# Altium PCB no_name.PcbDoc
Units mm, origin at the board's own origin, x right, y up, seen from the top; angles counter-clockwise.
Board outline 54.74 x 62.86 mm, 2 copper layers (Top Layer, Bottom Layer); 51 components, 55 nets, 267 pads, 40 vias.
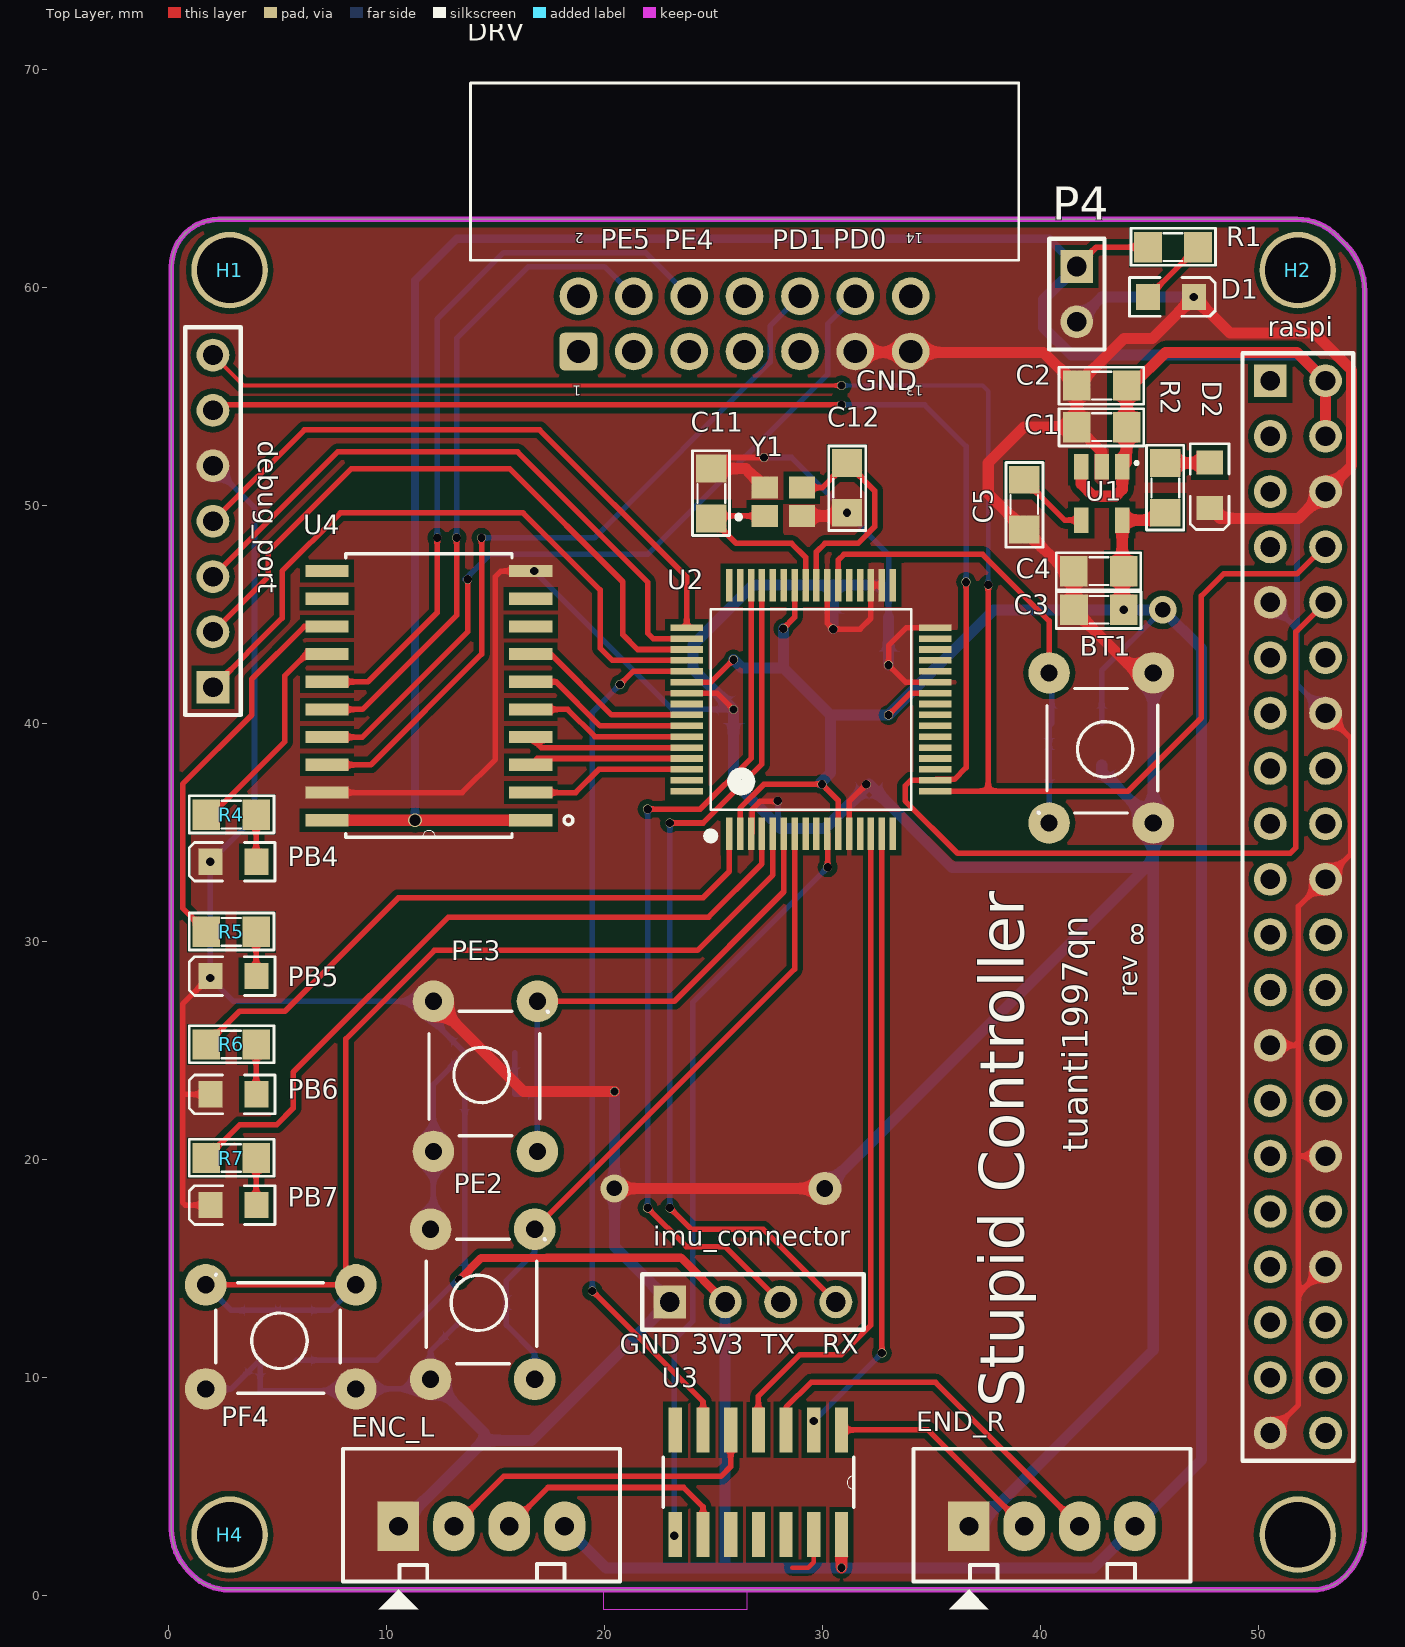
[diagram p0: Top Layer view]
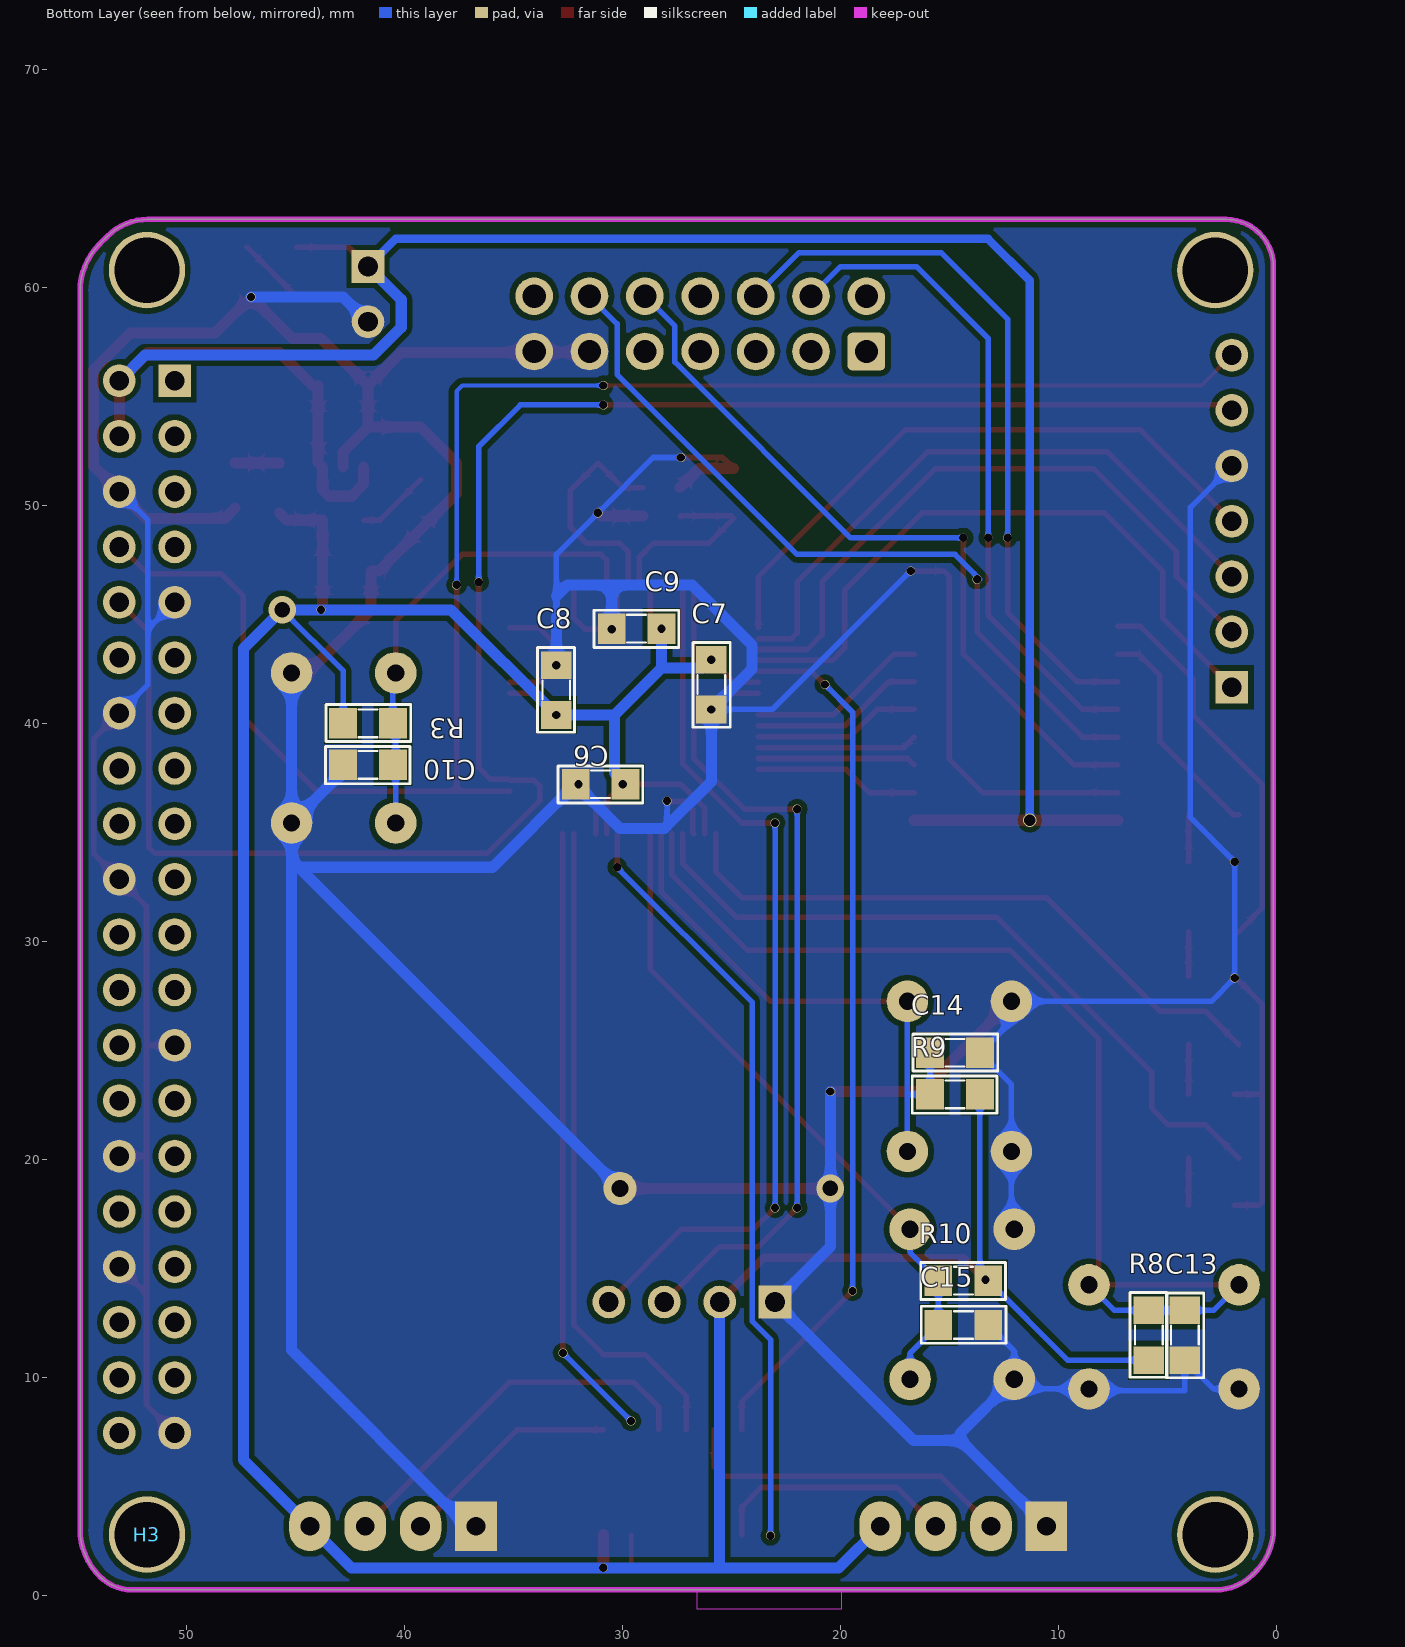
[diagram p1: Bottom Layer view, seen from below]
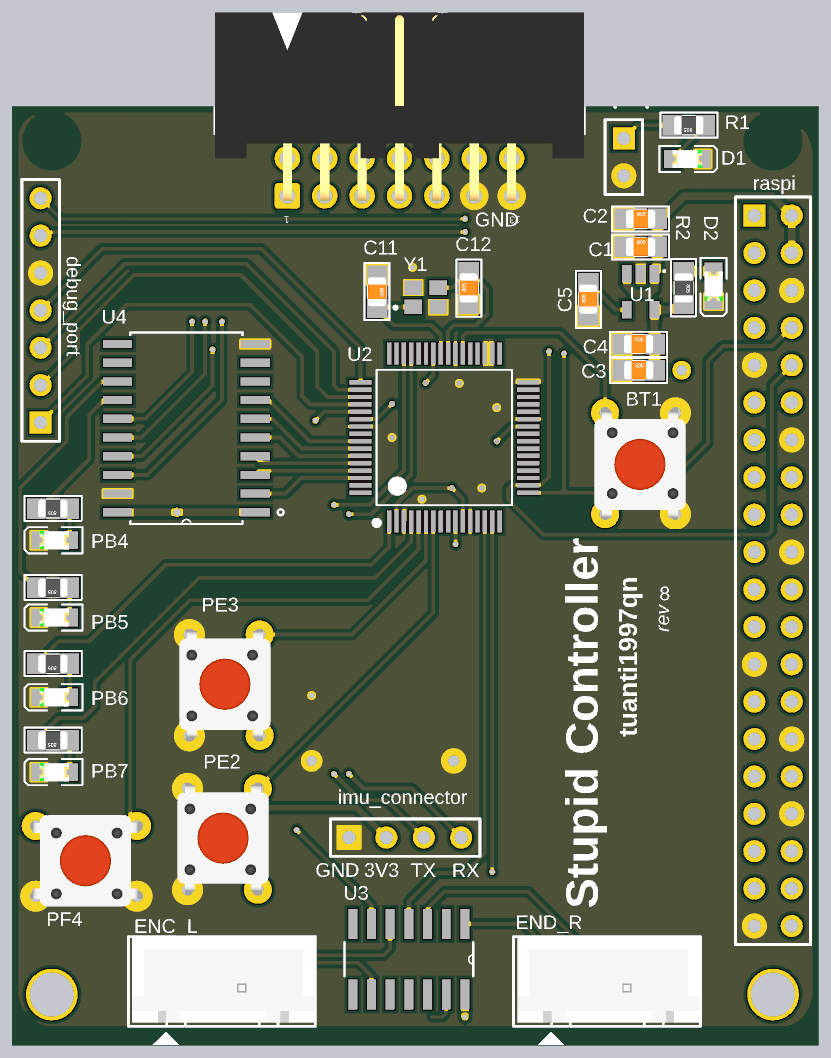
[diagram p2: 3D render of the assembled board from above, using the file's embedded part models]
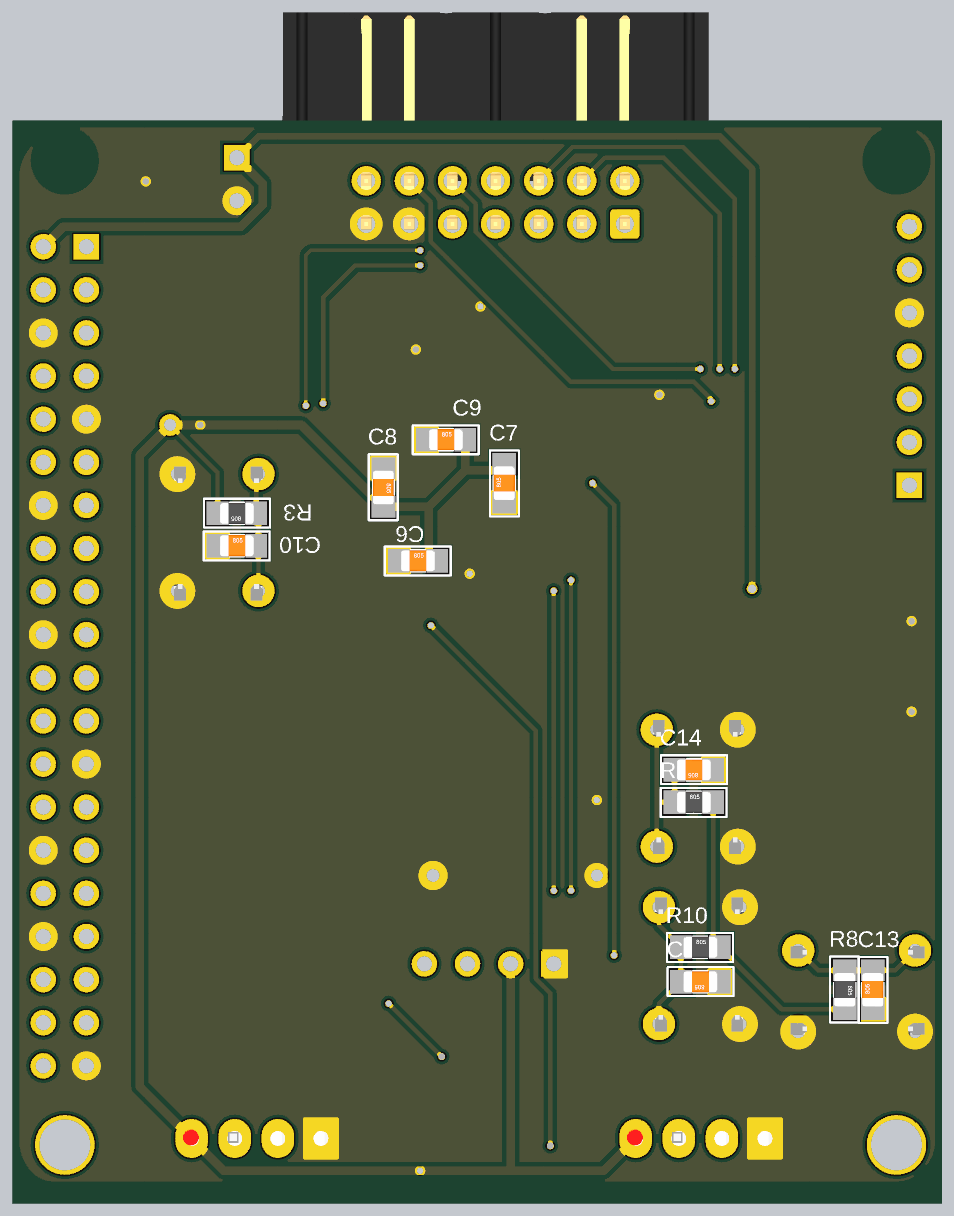
[diagram p3: 3D render of the assembled board from below, using the file's embedded part models]

## Layer stack, top to bottom
Top Solder: solder mask 0.0102, Solder Resist, Dk 3.5
Top Layer: signal copper 0.0356
Dielectric 1: dielectric 0.32, FR-4, Dk 4.8
Bottom Layer: signal copper 0.0356
Bottom Solder: solder mask 0.0102, Solder Resist, Dk 3.5

## Board outline
0.935,1.097 1.069,0.963 ccw(c2.781,2.676) 2.781,0.254 52.455,0.254 ccw(c52.455,2.391) 53.966,0.88 ccw(c51.798,3.048) 54.864,3.048 54.864,59.817 ccw(c51.798,59.817) 53.966,61.985 53.594,62.357 ccw(c51.754,60.517) 51.754,63.119 2.295,63.119 ccw(c2.295,60.951) 0.762,62.484 ccw(c2.295,60.951) 0.127,60.951 0.127,58.42 0.127,3.048 ccw(c2.886,3.048)
cut-out: 19.939,0.254 19.939,-0.635 26.543,-0.635 26.543,0.254

## Design rules (kind name [scope] priority, off if disabled: settings)
Clearance [All] p1: gap=0.254 ignorepadtopadclearanceinfootprint=FALSE except(0: Arc-Hole Track-Hole SMDPad-Hole THPad-Hole Via-Hole Fill-Hole Poly-Hole Region-Hole Text-Hole; 0.178: Arc-Arc Arc-Track Arc-SMDPad Arc-THPad Arc-Via Arc-Text Track-Track Track-SMDPad Track-THPad Track-Via Track-Text SMDPad-SMDPad SMDPad-THPad SMDPad-Via SMDPad-Text THPad-THPad THPad-Via THPad-Text Via-Via Via-Text Text-Text)
PlaneConnect [All] p1: planeconnectstyle=Direct reliefexpansion=0.508 reliefentries=4 reliefconductorwidth=0.254 reliefairgap=0.254
PolygonConnect [All] p1: connectstyle=Direct reliefconductorwidth=0.254 reliefentries=4 polygonreliefangle="90 Angle" airgapwidth=0.254
RoutingVias [All] p1: holewidth=0.711 width=1.27 viastyle="Through Hole" minholewidth=0.254 minwidth=0.305 maxholewidth=0.381 maxwidth=0.406
SolderMaskExpansion [All] p1: expansion=0.102
Width [All] p1: maxlimit=0.635 minlimit=0.203 preferedwidth=0.381
29 further rules are at their usual default settings.

## Components (designator, comment, footprint, x,y, rotation, side; value= is the part's Value field where it differs from the comment)
BT1 "BT" SW4 45.364,41.986 r270 top
C1 "Cap Non-Pol SMD" CAP-SM-0805 41.656,53.594 r0 top value=1uF
C2 "Cap Non-Pol SMD" CAP-SM-0805 41.656,55.499 r0 top value=104
C3 "Cap Non-Pol SMD" CAP-SM-0805 41.529,45.212 r0 top value=1uF
C4 "Cap Non-Pol SMD" CAP-SM-0805 41.52,46.99 r0 top value=104
C5 "Cap Non-Pol SMD" CAP-SM-0805 39.243,48.895 r90 top value=22nF
C6 "Cap Non-Pol SMD" CAP-SM-0805 32.131,37.211 r180 bottom value=104
C7 "Cap Non-Pol SMD" CAP-SM-0805 25.908,40.64 r90 bottom value=104
C8 "Cap Non-Pol SMD" CAP-SM-0805 33.02,42.672 r270 bottom value=104
C9 "Cap Non-Pol SMD" CAP-SM-0805 30.48,44.348 r180 bottom value=104
C10 "Cap Non-Pol SMD" CAP-SM-0805 42.799,38.1 r180 bottom value=100nF
C11 "Cap Non-Pol SMD" CAP-SM-0805 24.892,51.689 r270 top value=10pF
C12 "Cap Non-Pol SMD" CAP-SM-0805 31.115,49.657 r90 top value=10pF
C13 "Cap Non-Pol SMD" CAP-SM-0805 4.191,10.795 r90 bottom value=100nF
C14 "Cap Non-Pol SMD" CAP-SM-0805 13.589,24.892 r0 bottom value=100nF
C15 "Cap Non-Pol SMD" CAP-SM-0805 13.208,12.407 r0 bottom value=100nF
D1 "LED SMD" LED_0805_Blue 45.974,59.563 r0 top
D2 "LED SMD" LED_0805_Blue 47.752,50.927 r270 top
debug_port "DEBUG PORT" HDR1X7 2.032,41.656 r90 top (schematic designator P1)
DRV "shrouded box header" 14P_PCB_HEADER_BRD_MNT_RA 26.416,58.327 r90 top value="Double-row, 14 positions"
ENC_L "ENC_L" CON4 10.541,3.175 r0 top value="Connector 4"
END_R "END_R" CON4 36.703,3.175 r0 top value="Connector 4"
H1 "Hole" "LO KHOAN 3MM"#1 120.269,55.499 r0 top
H2 "Hole" "LO KHOAN 3MM"#2 115.316,55.499 r0 top
H3 "Hole" "LO KHOAN 3MM"#3 6.814,55.841 r180 bottom
H4 "Hole" "LO KHOAN 3MM"#4 2.794,2.794 r0 top
imu_connector "Header 4" HDR1X4 22.987,13.462 r0 top (schematic designator P3)
P4 "Header 2" HDR1X2 41.656,60.96 r270 top
PB4 "LED SMD" LED_0805_Blue 2.972,33.655 r180 top
PB5 "LED SMD" LED_0805_Blue 2.972,28.409 r180 top
PB6 "LED SMD" LED_0805_Blue 2.972,22.987 r180 top
PB7 "LED SMD" LED_0805_Blue 2.972,17.907 r180 top
PE2 "BT" SW4 11.811,10.248 r90 top
PE3 "BT" SW4 11.938,20.701 r90 top
PF4 "BT" SW4 8.255,9.271 r180 top
R1 "RESISTOR SMD" RES-SM-0805 47.21,61.849 r180 top value=1K
R2 "RESISTOR SMD" RES-SM-0805 45.72,51.946 r270 top value=1K
R3 "RESISTOR SMD" RES-SM-0805 40.513,40.005 r0 bottom value=1K
R4 "RESISTOR SMD" RES-SM-0805 4.013,35.814 r180 top value=1K
R5 "RESISTOR SMD" RES-SM-0805 4.013,30.441 r180 top value=1K
R6 "RESISTOR SMD" RES-SM-0805 4.013,25.273 r180 top value=1K
R7 "RESISTOR SMD" RES-SM-0805 4.013,20.066 r180 top value=1K
R8 "RESISTOR SMD" RES-SM-0805 5.842,13.081 r270 bottom value=1K
R9 "RESISTOR SMD" RES-SM-0805 15.875,22.987 r180 bottom value=1K
R10 "RESISTOR SMD" RES-SM-0805 15.494,14.439 r180 bottom value=1K
raspi "Header 20X2" HDR2X20 50.524,55.714 r270 top locked (schematic designator P2)
U1 "RT9193-33GB" *SOT94P279X129-5N 42.799,50.546 r270 top
U2 "TM4C123GH6PMI" *QFP50P1200X1200X160-64N 29.464,40.64 r90 top
U3 "SN74HC14DR" *SOIC127P600X175-14N 23.241,2.794 r270 top
U4 "SN74HC245DWR" *SOIC127P1030X265-20N 11.938,41.275 r180 top
Y1 "ECS-480-8-36-CKM" *XTAL_ECS-480-8-36-CKM 28.194,50.165 r0 top

## Footprints (in the part's own frame and the unit in brackets; to place one, negate y for a bottom-side part, rotate by r counter-clockwise, add the part's x,y. Pads: shape width x height; smd on the part's side, far side on the other; paste and mask are expansions set on the pad)
14P_PCB_HEADER_BRD_MNT_RA [mil] "HEADER BRD MNT R/A 14POS 2.54MM"
  round 40 on Mech15: 0(0,0) 0(460,0)
  rrect25% 68x68 hole 42: 1(-50,300)
  round 68 hole 42: 2(50,300) 3(-50,200) 4(50,200) 5(-50,100) 6(50,100) 7(-50,0) 8(50,0) 9(-50,-100) 10(50,-100) 11(-50,-200) 12(50,-200) 13(-50,-300) 14(50,-300)
  silkscreen extent 115,-495 435,495, body extent -62,-494 440,494, height 340
*QFP50P1200X1200X160-64N [mm]
  rect 1.5x0.3 smd: 1(-5.7,3.75) 2(-5.7,3.25) 3(-5.7,2.75) 4(-5.7,2.25) 5(-5.7,1.75) 6(-5.7,1.25) 7(-5.7,0.75) 8(-5.7,0.25) 9(-5.7,-0.25) 10(-5.7,-0.75) 11(-5.7,-1.25) 12(-5.7,-1.75) 13(-5.7,-2.25) 14(-5.7,-2.75) 15(-5.7,-3.25) 16(-5.7,-3.75) 33(5.7,-3.75) 34(5.7,-3.25) 35(5.7,-2.75) 36(5.7,-2.25) 37(5.7,-1.75) 38(5.7,-1.25) 39(5.7,-0.75) 40(5.7,-0.25) 41(5.7,0.25) 42(5.7,0.75) 43(5.7,1.25) 44(5.7,1.75) 45(5.7,2.25) 46(5.7,2.75) 47(5.7,3.25) 48(5.7,3.75)
  rect 0.3x1.5 smd: 17(-3.75,-5.7) 18(-3.25,-5.7) 19(-2.75,-5.7) 20(-2.25,-5.7) 21(-1.75,-5.7) 22(-1.25,-5.7) 23(-0.75,-5.7) 24(-0.25,-5.7) 25(0.25,-5.7) 26(0.75,-5.7) 27(1.25,-5.7) 28(1.75,-5.7) 29(2.25,-5.7) 30(2.75,-5.7) 31(3.25,-5.7) 32(3.75,-5.7) 49(3.75,5.7) 50(3.25,5.7) 51(2.75,5.7) 52(2.25,5.7) 53(1.75,5.7) 54(1.25,5.7) 55(0.75,5.7) 56(0.25,5.7) 57(-0.25,5.7) 58(-0.75,5.7) 59(-1.25,5.7) 60(-1.75,5.7) 61(-2.25,5.7) 62(-2.75,5.7) 63(-3.25,5.7) 64(-3.75,5.7)
  silkscreen extent -6.08,-4.6 4.6,4.88
*SOIC127P600X175-14N [mil]
  rect 81x24 smd: 1(-189,300) 2(-189,250) 3(-189,200) 4(-189,150) 5(-189,100) 6(-189,50) 7(-189,0) 8(0,0) 9(0,50) 10(0,100) 11(0,150) 12(0,200) 13(0,250) 14(0,300)
  silkscreen extent -140,-22 -49,322
*SOIC127P1030X265-20N [mil]
  rect 78x22 smd: 1(-184,225) 2(-184,175) 3(-184,125) 4(-184,75) 5(-184,25) 6(-184,-25) 7(-184,-75) 8(-184,-125) 9(-184,-175) 10(-184,-225) 11(184,-225) 12(184,-175) 13(184,-125) 14(184,-75) 15(184,-25) 16(184,25) 17(184,75) 18(184,125) 19(184,175) 20(184,225)
  silkscreen extent -260,-256 150,256
*SOT94P279X129-5N [mm]
  rect 1.17x0.67 smd: 1(-1.22,0.94) 2(-1.22,0) 3(-1.22,-0.94) 4(1.22,-0.94) 5(1.22,0.94)
  silkscreen extent -1.47,1.53 -1.33,1.67
*XTAL_ECS-480-8-36-CKM [mm]
  rect 1.2x1 smd: 1(-0.85,-0.65) 2(0.85,-0.65) 3(0.85,0.65) 4(-0.85,0.65)
  silkscreen extent -2.15,-0.8 -1.95,-0.6
CAP-SM-0805 [mil]
  rect 50x55 smd: 1(0,0) 2(90,0)
  silkscreen extent -32,-34 121,33, body extent 6,-25 84,25, height 31
CON4 [mil]
  rect 75x90 hole 34: 1(0,0)
  oval 75x90 hole 34: 2(100,0) 3(200,0) 4(300,0)
  silkscreen extent -100,-150 400,140, body extent -90,-90 398,136, height 276
HDR1X2 [mm] "Connector; Header; 2 Position"
  rect 1.5x1.5 hole 0.9: 1(0,0)
  round 1.5 hole 0.9: 2(2.54,0)
  silkscreen extent -1.27,-1.27 3.81,1.27
HDR1X4 [mm] "Connector; Header; 4 Position"
  rect 1.5x1.5 hole 0.9: 1(0,0)
  round 1.5 hole 0.9: 2(2.54,0) 3(5.08,0) 4(7.62,0)
  silkscreen extent -1.27,-1.27 8.89,1.27
HDR1X7 [mm] "Connector; Header; 7 Position"
  rect 1.5x1.5 hole 0.9: 1(0,0)
  round 1.5 hole 0.9: 2(2.54,0) 3(5.08,0) 4(7.62,0) 5(10.16,0) 6(12.7,0) 7(15.24,0)
  silkscreen extent -1.27,-1.27 16.51,1.27
HDR2X20 [mm] "Connector; Header; 20x2 Position"
  rect 1.5x1.5 hole 0.9: 1(0,0)
  round 1.5 hole 0.9: 2(0,2.54) 3(2.54,0) 4(2.54,2.54) 5(5.08,0) 6(5.08,2.54) 7(7.62,0) 8(7.62,2.54) 9(10.16,0) 10(10.16,2.54) 11(12.7,0) 12(12.7,2.54) 13(15.24,0) 14(15.24,2.54) 15(17.78,0) 16(17.78,2.54) 17(20.32,0) 18(20.32,2.54) 19(22.86,0) 20(22.86,2.54) 21(25.4,0) 22(25.4,2.54) 23(27.94,0) 24(27.94,2.54) 25(30.48,0) 26(30.48,2.54) 27(33.02,0) 28(33.02,2.54) 29(35.56,0) 30(35.56,2.54) 31(38.1,0) 32(38.1,2.54) 33(40.64,0) 34(40.64,2.54) 35(43.18,0) 36(43.18,2.54) 37(45.72,0) 38(45.72,2.54) 39(48.26,0) 40(48.26,2.54)
  silkscreen extent -1.27,-1.27 49.53,3.81
LED_0805_Blue [mm] "Chip LED, 2-Leads, Body 2.0x1.3mm, IPC Medium Density"
  rect 1.1x1.2 smd: 1(-1.05,0) 2(1.05,0)
  silkscreen extent -1.91,-0.89 2.03,0.89, body extent -1,-0.63 1,0.62, height 0.68
"LO KHOAN 3MM"#1 [mil]
  round 138 hole 118.1: 1(-4625,208.46)
"LO KHOAN 3MM"#2 [mil]
  round 138 hole 118.1: 1(-2500.87,208.46)
"LO KHOAN 3MM"#3 [mil]
  round 138 hole 118.1: 1(-1770.87,-2088.46)
"LO KHOAN 3MM"#4 [mil]
  round 138 hole 118.1: 1(0,0)
RES-SM-0805 [mil]
  rect 50x55 smd: 1(0,0) 2(90,0)
  silkscreen extent -32,-34 121,33, body extent 6,-25 84,25, height 31
SW4 [mil] "SW button 4pin, 250 x250 mil"
  round 75 hole 31: 1(-13,-8) 1(258,-8) 2(-13,-196) 2(258,-196)
  silkscreen extent 15,-215 240,0, body extent -31,-225 281,19, height 276

## Part data
BT1 PE2 PE3 PF4: library part BUTTON
C1 C2 C3 C4 C5 C6 C7 C8 C9 C10 C11 C12 C13 C14 C15: "Capacitor"
D1 D2 PB4 PB5 PB6 PB7: "LED"
debug_port: library part "Header 7", "Header, 7-Pin", LatestRevisionDate=17-Jul-2002, LatestRevisionNote="Re-released for DXP Platform.", Publisher="Altium Limited"
DRV: library part CONN_HEADER_2x7P_RA_0.100in_Male, "Header THD 14 POS Double-row right-angle 2.54mm pitch", Manufacturer 1=3M, Manufacturer Part Number 1=D2514-5002-AR, Package / Case="Connector header; 2.54mm pitch", Supplier Part Number 1=MHE14E-ND, ComponentLink1Description=http://multimedia.3m.com/mws/mediawebserver?66666UuZjcFSLXTtm8T_oxMcEVuQEcuZgVs6EVs6E666666--, ComponentLink1URL=http://multimedia.3m.com/mws/mediawebserver?66666UuZjcFSLXTtm8T_oxMcEVuQEcuZgVs6EVs6E666666--, Connector Type="Header, Shrouded", Contact Mating Length="0.243\" (6.17mm)", Contact Type="Male Pin", Number of Positions=14, Number of Rows=2, Pitch="0.100\" (2.54mm)", QtyOverride=1, Row Spacing="0.100\" (2.54mm)", SCDType=source, Supplier 1=Digi-Key
ENC_L END_R: library part Con4, "Connector 4"
H1 H2 H3 H4: "Hole 3mm"
imu_connector: "Header, 4-Pin", LatestRevisionDate=17-Jul-2002, LatestRevisionNote="Re-released for DXP Platform.", Publisher="Altium Limited"
P4: "Header, 2-Pin", LatestRevisionDate=17-Jul-2002, LatestRevisionNote="Re-released for DXP Platform.", Publisher="Altium Limited"
R1 R2 R3 R4 R5 R6 R7 R8 R9 R10: "Resistor"
raspi: "Header, 20-Pin, Dual row", LatestRevisionDate=17-Jul-2002, LatestRevisionNote="Re-released for DXP Platform.", Publisher="Altium Limited"
U1: "RT9193 Series 300 mA 3.3 V Ultra-Low Noise Ultra-Fast CMOS LDO Regulator-SC-70-5", Package="SOT-23-5 Richtek", Availability=Unavailable, MF="Richtek USA", MP=RT9193-33GB, Price=None, SnapEDA_Link=https://www.snapeda.com/parts/RT9193-33GB/Richtek%20USA%20Inc./view-part/?ref=snap
U2: "MCU 32-Bit Tiva C ARM Cortex M4F RISC 256KB Flash 1.2V/3.3V 64-Pin LQFP Tray/Tube", Package="LQFP-64 Texas Instruments", Availability=Unavailable, MF="Texas Instruments", MP=TM4C123GH6PMI, Price=None, SnapEDA_Link=https://www.snapeda.com/parts/TM4C123GH6PMI/Texas%20Instruments/view-part/?ref=snap
U3: "Inverter Schmitt Trigger 6-Element CMOS 14-Pin SOIC T/R", Package="SOIC-14 Texas Instruments", Availability=Unavailable, MF="Texas Instruments", MP=SN74HC14DR, Price=None, SnapEDA_Link=https://www.snapeda.com/parts/SN74HC14DR/Texas%20Instruments/view-part/?ref=snap
U4: "Logic IC - Receiver, transceiver Texas Instruments SN74HC245DWR SOIC 20", Package="SOIC-20 Texas Instruments", Availability=Unavailable, MF="Texas Instruments", MP=SN74HC245DWR, Price=None, SnapEDA_Link=https://www.snapeda.com/parts/SN74HC245DWR/Texas%20Instruments/view-part/?ref=snap
Y1: "The miniature ECX-2236 is a very compact SMD Crystal. The 2.5 x 2.0 x 0.55 mm ceramic package is ideal for today's SMD manufacturing environment.", Package="Package Analog Devices", Availability=Unavailable, MF="ECS Inc.", MP=ECS-480-8-36-CKM, Price=None, SnapEDA_Link=https://www.snapeda.com/parts/ECS-480-8-36-CKM/ECS%20Inc./view-part/?ref=snap

## Free pads (board coordinates)
  round 1.524 hole 0.762: 2(30.099,18.669)

## Via types
v1: diameter 0.406, hole 0.381, Top Layer to Bottom Layer, 37 vias
v2: diameter 1.27, hole 0.711, Top Layer to Bottom Layer, 2 vias
v3: diameter 0.635, hole 0.508, Top Layer to Bottom Layer, 1 vias

## Nets (pads, with @x,y where several pads share a name; then routed paths per layer and width w, separated by ;. In a path a pad name is that pad's centre, name@x,y a point inside that pad or via, vN(x,y) a via of type N, cw(c..) or ccw(c..) an arc to the next point about the centre after c; other vN are vias at no path point)
1: U3.11
2: U3.13 | length 2.4
  Top Layer w0.203: 28.595,1.27 29.337,1.27 29.591,1.524 U3.13
3V3: C3.2 C4.2 C6.2 C7.2 C8.2 C9.2 ENC_L.4 END_R.4 imu_connector.2 R2.2 R3.2 R8.2 R9.2 R10.2 U1.5 U2.2 U2.11 U2.26 U2.42 U2.54 U3.14 | length 172.2
  Top Layer w0.254: U2.54 24.872,41.89 v1(25.908,42.926) ; U2.2 26.214,36.12 27.305,37.211 v1(29.972,37.211) 30.714,36.469 U2.11 ; v1(28.194,44.348) 28.714,44.868 U2.42 ; v1(33.02,40.386) 34.024,41.39 U2.26
  Top Layer w0.381: v1(13.335,14.478) 14.337,15.48 17.336,15.48 17.35,15.494 23.495,15.494 imu_connector.2
  Top Layer w0.508: v1(30.861,1.27) U3.14 ; v1(43.815,45.212) 43.739,45.288 U1.5 45.386,49.326 R2.2
  Bottom Layer w0.254: R8.2 9.564,10.795 R10.2 ; R10.2@13.291,14.522 13.589,14.82 R9.2 ; R3.2 42.799,42.418 v2(45.593,45.212)
  Bottom Layer w0.508: ENC_L.4 20.066,1.27 25.527,1.27 ; imu_connector.2 25.527,1.27 ; v1(25.908,42.926) 26.289,42.545 28.194,42.545 ; v1(28.194,44.348) 28.194,42.545 ; C6.2@29.909,37.274 30.353,37.719 30.353,40.386 ; 25.527,1.27 v1(30.861,1.27) 42.418,1.27 END_R.4 47.371,6.223 47.371,43.434 v2(45.593,45.212) v1(43.815,45.212) 37.846,45.212 v1(33.02,40.386) 30.353,40.386 ; 28.194,42.545 30.353,40.386
+5: C1.2 C2.2 P4.1 R1.2 raspi.2 raspi.4 U1.1 U1.3 U4.1 U4.20 | length 107.3
  Top Layer w0.254: P4.1 42.545,61.849 R1.2
  Top Layer w0.508: U4.20 v3(11.303,35.56) U4.1 ; U1.3 41.859,50.978 42.418,50.419 43.434,50.419 43.739,50.724 U1.1 43.942,51.969 C1.2 C2.2 ; C2.2@44.196,55.499 45.72,57.023 51.755,57.023 raspi.2 raspi.4
  Bottom Layer w0.381: v3(11.303,35.56) 11.303,60.325 13.208,62.23 40.386,62.23 P4.1
  Bottom Layer w0.508: P4.1 40.132,59.436 40.132,58.166 41.402,56.896 51.882,56.896 raspi.2
BTN_DEBUG_1: C13.2 PF4.2 R8.1 U2.5 | length 50.8
  Top Layer w0.254: PF4.2@1.702,14.249 8.585,14.249 8.128,14.707 8.128,25.527 12.192,29.591 24.257,29.591 27.714,33.048 U2.5
  Bottom Layer w0.254: PF4.2@1.702,14.249 2.87,13.081 C13.2 R8.1 7.417,13.081 PF4.2@8.585,14.249
BTN_DEBUG_2: C14.2 PE3.2 R9.1 U2.6 | length 25.9
  Top Layer w0.254: PE3.2@16.916,27.254 23.19,27.254 28.214,32.278 U2.6
  Bottom Layer w0.254: C14.2 R9.1 16.789,22.987 16.916,22.86 ; PE3.2@16.916,20.371 16.916,22.86 ; PE3.2@16.916,27.254 16.916,22.86
BTN_DEBUG_3: C15.2 PE2.2 R10.1 U2.7 | length 31
  Top Layer w0.254: PE2.2@16.789,16.801 28.714,28.726 U2.7
  Bottom Layer w0.254: PE2.2@16.789,9.918 16.789,11.112 C15.2 R10.1 16.789,15.734 PE2.2@16.789,16.801
DEBUG_TCK: debug_port.1 U2.52 | length 30.7
  Top Layer w0.254: debug_port.1 5.207,44.831 5.207,46.99 7.877,49.66 16.253,49.66 19.789,46.124 19.789,43.457 20.356,42.89 U2.52
DEBUG_TDI: debug_port.4 U2.49 | length 28.6
  Top Layer w0.254: debug_port.4 6.223,53.467 17.018,53.467 23.764,46.721 U2.49
DEBUG_TDO: debug_port.3 U2.50 | length 29
  Top Layer w0.254: debug_port.3 7.747,52.451 16.002,52.451 21.971,46.482 21.971,44.144 22.225,43.89 U2.50
DEBUG_TMS: debug_port.2 U2.51 | length 30.4
  Top Layer w0.254: debug_port.2 4.572,46.736 4.572,47.879 8.382,51.689 15.636,51.689 20.828,46.497 20.828,44.069 21.507,43.39 U2.51
EN0_A: ENC_L.2 U3.5 | length 15.5
  Top Layer w0.254: ENC_L.2 15.367,5.461 25.333,5.461 25.781,5.909 U3.5
EN0_B: ENC_L.3 U3.9 | length 11.3
  Top Layer w0.254: ENC_L.3 17.399,4.953 23.622,4.953 24.511,4.064 U3.9
EN1_A: END_R.2 U3.1 | length 10.2
  Top Layer w0.254: U3.1 34.823,7.595 END_R.2
EN1_B: END_R.3 U3.3 | length 17.7
  Top Layer w0.254: U3.3 28.321,8.636 29.464,9.779 35.179,9.779 END_R.3
GND: BT1.1 C1.1 C2.1 C3.1 C4.1 C5.1 C6.1 C7.1 C8.1 C9.1 C10.1 C11.1 C12.1 C13.1 C14.1 C15.1 D1.2 D2.2 debug_port.5 DRV.11 DRV.13 ENC_L.1 END_R.1 imu_connector.1 P4.2 pad.2 PB4.2 PB5.2 PB6.2 PB7.2 PE2.1 PE3.1 PF4.1 raspi.6 raspi.9 raspi.14 raspi.20 raspi.25 raspi.30 raspi.34 raspi.39 U1.2 U2.3 U2.12 U2.27 U2.32 U2.34 U2.35 U2.39 U2.55 U4.10 U4.19 Y1.2 Y1.4 | length 426.3
  Top Layer w0.254: PB5.2@1.869,28.357 0.643,27.13 0.643,22.996 ; PB7.2 0.77,17.907 0.643,18.034 0.643,22.996 ; PB6.2 0.652,22.987 0.643,22.996 ; U4.19 13.462,36.83 14.986,38.354 14.986,46.736 15.24,46.99 U4.10 v1(16.764,46.99) ; U2.55 25.158,41.39 v1(25.908,40.64) ; C11.1 25.4,52.197 v1(27.305,52.197) ; U2.3 26.759,34.985 26.759,36.055 27.125,36.42 27.911,36.42 v1(27.94,36.449) ; U2.39 30.214,44.589 v1(30.48,44.323) 31.713,44.323 32.214,44.824 U2.35 U2.34 ; U2.12 31.214,36.421 v1(32.004,37.211) ; U2.27 33.802,41.89 v1(33.02,42.672) 33.02,43.573 33.837,44.39 U2.32 ; raspi.39 51.816,8.746 51.816,13.826 ; raspi.25 51.65,25.234 51.816,25.4 ; raspi.34 51.816,13.826 ; raspi.30 51.904,20.154 51.816,20.066 ; raspi.14 54.229,39.309 54.229,34.019 raspi.20 51.816,31.606 51.816,25.4 ; 51.816,13.826 51.816,20.066 ; 51.816,20.066 51.816,25.4
  Top Layer w0.508: PE3.1@12.141,27.254 16.281,23.114 v1(20.447,23.114) ; v2(20.447,18.669) pad.2 ; C11.1 26.47,51.689 Y1.4 ; Y1.2 30.973,49.515 v1(31.115,49.657) ; DRV.11@32.258,57.023 40.132,57.023 C2.1 ; U1.2 42.799,52.451 C1.1 ; BT1.1@45.161,42.316 44.425,42.316 C3.1 41.52,45.221 C4.1 41.148,46.99 C5.1 37.592,50.546 37.592,51.943 39.243,53.594 C1.1 ; D2.2 48.226,49.403 51.833,49.403 raspi.6 54.246,51.816 54.246,56.22 52.554,57.912 48.675,57.912 v1(47.024,59.563) 45.119,57.658 43.815,57.658 C2.1 ; C1.1 C2.1
  Bottom Layer w0.254: PF4.1@1.702,9.474 2.87,9.474 C13.1 4.191,9.398 8.509,9.398 8.585,9.474 11.571,9.474 12.014,9.918 12.014,11.213 C15.1 ; debug_port.5 3.937,49.911 3.937,35.687 v1(1.905,33.655) v1(1.905,28.321) 2.972,27.254 12.141,27.254 12.141,26.34 C14.1 12.141,23.444 12.141,20.371 12.141,16.928 PE2.1@12.014,16.801 ; v1(16.764,46.99) 23.114,40.64 v1(25.908,40.64) ; v1(27.305,52.197) 28.575,52.197 v1(31.115,49.657) 33.02,47.752 33.02,45.847 33.02,44.868 ; v1(27.94,36.449) 27.94,35.306 28.067,35.179 ; raspi.9 51.754,44.324 ; raspi.14 51.754,41.784 51.754,44.324 ; raspi.6 51.754,49.324 51.754,44.324
  Bottom Layer w0.508: ENC_L.1 14.478,7.112 ; PE2.1@12.014,9.918 14.478,7.454 14.478,7.112 ; v1(20.447,23.114) v2(20.447,18.669) 20.447,16.002 imu_connector.1 16.637,7.112 14.478,7.112 ; 27.94,35.306 25.908,37.338 v1(25.908,40.64) 24.042,42.506 24.042,43.6 26.797,46.355 30.48,46.355 ; 28.067,35.179 30.099,35.179 C6.1@32.067,37.148 ; pad.2 44.831,33.401 ; C9.1 30.48,46.355 ; C6.1 35.941,33.401 44.831,33.401 ; v1(33.02,42.672) 33.02,44.868 ; 33.02,45.847 32.512,46.355 30.48,46.355 ; END_R.1 37.084,3.175 45.161,11.252 45.161,33.731 ; P4.2 42.799,59.563 v1(47.024,59.563) ; C10.1 42.799,37.795 BT1.1@45.161,35.433 ; BT1.1@45.161,42.316 BT1.1@45.161,35.433 ; 44.831,33.401 45.161,33.731 ; 45.161,33.731 BT1.1@45.161,35.433
H-BRG_/RSTAB: DRV.6 U4.15 | length 33.5
  Top Layer w0.254: U4.15 9.144,41.91 12.319,45.085 v1(12.319,48.514)
  Bottom Layer w0.254: v1(12.319,48.514) 12.319,58.547 15.367,61.595 21.878,61.595 DRV.6
H-BRG_/RSTCD: DRV.12 U4.17 | length 35.6
  Top Layer w0.254: U4.17 8.89,39.37 13.716,44.196 v1(13.716,46.609)
  Bottom Layer w0.254: v1(13.716,46.609) 13.589,46.609 14.732,47.752 21.971,47.752 30.226,56.007 30.226,58.327 DRV.12
H-BRG_PWMA: DRV.4 U4.16 | length 30.5
  Top Layer w0.254: U4.16 8.89,40.64 13.208,44.958 v1(13.208,48.514)
  Bottom Layer w0.254: v1(13.208,48.514) 13.208,57.658 16.501,60.951 19.982,60.951 DRV.4
H-BRG_PWMC: DRV.10 U4.18 | length 34.7
  Top Layer w0.254: U4.18 9.271,38.1 14.351,43.18 v1(14.351,48.514)
  Bottom Layer w0.254: v1(14.351,48.514) 19.525,48.514 27.584,56.573 27.584,58.225 DRV.10
LED_DEBUG_1: U2.58 U4.6 | length 8
  Top Layer w0.254: U4.6 17.769,41.91 19.789,39.89 U2.58
LED_DEBUG_1_: R4.2 U4.14 | length 10.4
  Top Layer w0.254: R4.2 1.98,35.814 5.334,39.168 5.334,42.189 6.325,43.18 U4.14
LED_DEBUG_2: U2.57 U4.7 | length 8.3
  Top Layer w0.254: U4.7 17.526,43.18 20.316,40.39 U2.57
LED_DEBUG_2_: R5.2 U4.13 | length 17.8
  Top Layer w0.254: R5.2 0.643,31.525 0.643,37.219 3.81,40.386 3.81,42.037 6.223,44.45 U4.13
LED_DEBUG_3: R6.2 U2.1 | length 29
  Top Layer w0.254: R6.2 3.251,26.797 5.334,26.797 10.541,32.004 24.511,32.004 25.714,33.207 U2.1
LED_DEBUG_4: R7.2 U2.4 | length 33.4
  Top Layer w0.254: R7.2 3.251,21.59 4.953,21.59 5.715,22.352 5.715,24.003 12.827,31.115 24.765,31.115 27.214,33.564 U2.4
NetC5_2: C5.2 U1.4 | length 3.4
  Top Layer w0.254: C5.2 41.098,49.326 U1.4
NetD1_1: D1.1 R1.1 | length 3.2
  Top Layer w0.254: D1.1 R1.1
NetD2_1: D2.1 R2.1 | length 2
  Top Layer w0.508: R2.1 47.721,51.946 D2.1
NetP6_1: 
NetP6_2: 
NetPB4_1: PB4.1 R4.1 | length 2.2
  Top Layer w0.254: R4.1 4.013,33.664 PB4.1
NetPB5_1: PB5.1 R5.1 | length 2
  Top Layer w0.254: R5.1 4.013,28.418 PB5.1
NetPB6_1: PB6.1 R6.1 | length 2.3
  Top Layer w0.254: R6.1 4.013,22.996 PB6.1
NetPB7_1: PB7.1 R7.1 | length 2.2
  Top Layer w0.254: R7.1 4.013,17.916 PB7.1
OSC0: C12.2 U2.40 Y1.3 | length 10.7
  Top Layer w0.254: Y1.3 29.987,50.815 C12.2 32.385,50.673 32.385,49.022 31.623,48.26 30.099,48.26 29.714,47.875 U2.40
OSC1: C11.2 U2.41 Y1.1 | length 8.9
  Top Layer w0.254: Y1.1@27.344,49.491 Y1.1 25.004,49.515 C11.2 26.035,48.26 28.575,48.26 29.214,47.621 U2.41
PWM_A: U2.60 U4.4 | length 7.4
  Top Layer w0.254: U4.4 17.092,38.89 U2.60
PWMC: U2.62 U4.2 | length 7.6
  Top Layer w0.254: U4.2 18.669,36.83 19.729,37.89 U2.62
QEI0_A: U2.53 U3.6 | length 40.1
  Top Layer w0.254: v1(19.431,13.97) 24.511,8.89 U3.6 ; v1(20.701,41.783) 21.308,42.39 U2.53
  Bottom Layer w0.254: v1(19.431,13.97) 19.431,40.513 v1(20.701,41.783)
QEI0_B: U2.10 U3.8 | length 35.2
  Top Layer w0.254: v1(23.19,2.743) U3.8 ; U2.10 30.226,34.928 v1(30.226,33.401)
  Bottom Layer w0.254: v1(23.19,2.743) 23.19,11.734 24.042,12.586 24.042,27.217 v1(30.226,33.401)
QEI1_A: U2.15 U3.2 | length 28.2
  Top Layer w0.254: v1(32.714,11.124) U2.15
  Bottom Layer w0.254: v1(29.591,8.001) v1(32.714,11.124)
QEI1_B: U2.14 U3.4 | length 30.6
  Top Layer w0.254: U3.4 27.051,9.144 28.956,11.049 30.861,11.049 32.214,12.402 U2.14
RAS_RX: debug_port.6 raspi.10 U2.18 | length 84.8
  Top Layer w0.254: debug_port.6 2.286,54.61 v1(30.861,54.61) ; v1(36.576,46.482) 36.576,37.971 36.04,37.435 35.209,37.435 U2.18 34.036,37.39 33.782,37.136 33.782,36.449 36.195,34.036 51.435,34.036 51.706,34.307 51.706,44.196 raspi.10
  Bottom Layer w0.254: v1(30.861,54.61) 34.671,54.61 36.576,52.705 v1(36.576,46.482)
RAS_TX: debug_port.7 raspi.8 U2.17 | length 80.4
  Top Layer w0.203: debug_port.7 3.429,55.499 v1(30.861,55.499)
  Top Layer w0.254: U2.17 37.592,36.89 ; v1(37.592,46.355) 37.592,36.89 ; raspi.8 52.986,48.094 51.755,46.863 48.387,46.863 47.371,45.847 47.371,40.259 44.002,36.89 37.592,36.89
  Bottom Layer w0.203: v1(30.861,55.499) 37.338,55.499 37.592,55.245 v1(37.592,46.355)
RST: BT1.2 C10.2 R3.1 U2.38 | length 21.6
  Top Layer w0.254: U2.38 30.714,47.498 30.968,47.752 37.338,47.752 40.386,44.704 BT1.2@40.386,42.316
  Bottom Layer w0.254: BT1.2@40.386,35.433 40.386,39.878 R3.1 40.513,42.189 BT1.2@40.386,42.316
RST_AB: U2.59 U4.5 | length 7.7
  Top Layer w0.254: U4.5 18.297,40.64 19.547,39.39 U2.59
RST_CD: U2.61 U4.3 | length 7.3
  Top Layer w0.254: U4.3 16.902,38.39 U2.61
RXI: 
SCL: 
SDA: 
TM4_U1RX: imu_connector.4 U2.45 | length 40.6
  Top Layer w0.254: v1(22.987,17.78) 23.966,16.801 27.268,16.801 imu_connector.4 ; v1(22.987,35.433) 24.511,35.433 27.214,38.136 U2.45
  Bottom Layer w0.254: v1(22.987,17.78) v1(22.987,35.433)
TM4_U1TX: imu_connector.3 U2.46 | length 39.8
  Top Layer w0.254: v1(21.971,17.78) 23.749,16.002 25.527,16.002 imu_connector.3 ; v1(21.971,36.068) 24.384,36.068 26.714,38.398 U2.46
  Bottom Layer w0.254: v1(21.971,17.78) v1(21.971,36.068)
TXI: 
VCC: 
pads on no net: DRV.0 DRV.1 DRV.2 DRV.3 DRV.5 DRV.7 DRV.8 DRV.9 DRV.14 H1.1 H2.1 H3.1 H4.1 raspi.1 raspi.3 raspi.5 raspi.7 raspi.11 raspi.12 raspi.13 raspi.15 raspi.16 raspi.17 raspi.18 raspi.19 raspi.21 raspi.22 raspi.23 raspi.24 raspi.26 raspi.27 raspi.28 raspi.29 raspi.31 raspi.32 raspi.33 raspi.35 raspi.36 raspi.37 raspi.38 raspi.40 U2.8 U2.9 U2.13 U2.16 U2.19 U2.20 U2.21 U2.22 U2.23 U2.24 U2.25 U2.28 U2.29 U2.30 U2.31 U2.33 U2.36 U2.37 U2.43 U2.44 U2.47 U2.48 U2.56 U2.63 U2.64 U3.7 U3.10 U3.12 U4.8 U4.9 U4.11 U4.12

## Polygon pours and split planes (outlines as drawn)
GND on Bottom Layer "Bottom Layer-GND" (solid, remove dead copper, pour order 12): -5.715,67.691 55.88,67.691 64.643,58.928 56.388,50.673 56.388,-7.366 -13.97,-7.366 -8.763,-2.159 -8.763,68.707 -8.001,69.469
GND on Top Layer "Top Layer-GND" (solid, remove dead copper, pour order 14): -7.62,65.786 -7.62,1.397 4.064,-10.287 67.31,-10.287 67.31,68.072 64.77,70.612 63.246,69.088 -9.779,69.088

## Keep-outs
Keep-Out Layer:
  lines w0.254: 0.127,3.048 ccw(c2.886,3.048) 0.935,1.097 1.069,0.963 ccw(c2.781,2.676) 2.781,0.254 19.939,0.254 28.448,0.254 38.608,0.254 52.455,0.254 ccw(c52.455,2.391) 53.966,0.88 ccw(c51.798,3.048) 54.864,3.048 54.864,59.817 ccw(c51.798,59.817) 53.966,61.985 53.594,62.357 ccw(c51.754,60.517) 51.754,63.119 2.295,63.119 ccw(c2.295,60.951) 0.762,62.484 ccw(c2.295,60.951) 0.127,60.951 0.127,58.42 0.127,3.048

## Other copper
Bottom Layer:
  region: -4.064,68.58

## Silkscreen, mask and mechanical layers (free items; w line width, h text height)
Top Overlay:
  text "PE5" at 19.812,61.468 h1.52
  text "PD0" at 30.48,61.468 h1.52
  text "PE4" at 22.733,61.452 h1.52
  text "PD1" at 27.686,61.452 h1.52
  text "GND" at 31.528,54.991 h1.52
  text "8" at 44.069,29.591 h1.5
  text "rev" at 44.729,27.432 h1.5 r90
  text "tuanti1997qn" at 42.545,20.32 h2 r90
  text "GND" at 20.701,10.795 h1.52
  text "3V3" at 24.003,10.795 h1.52
  text "TX" at 27.178,10.779 h1.52
  text "RX" at 29.972,10.779 h1.52
  text "Stupid Controller" at 39.878,8.636 h3.5 r90

## Text inside footprints (layer, text, board x,y; h text height)
DRV: Top Overlay "2" at 19.05,62.645 h0.76 r180; Top Overlay "1" at 18.923,55.66 h0.76 r180; Top Overlay "14" at 34.62,62.645 h0.76 r180; Top Overlay "13" at 34.62,55.66 h0.76 r180